# Altium PCB arm.PcbDoc
Units mil, origin at the board's own origin, x right, y up, seen from the top; angles counter-clockwise.
Board outline 6000 x 4000 mil, 2 copper layers (Top Layer, Bottom Layer); 92 components, 88 nets, 431 pads, 0 vias.
Unrouted connection lines stored in the file: 251.
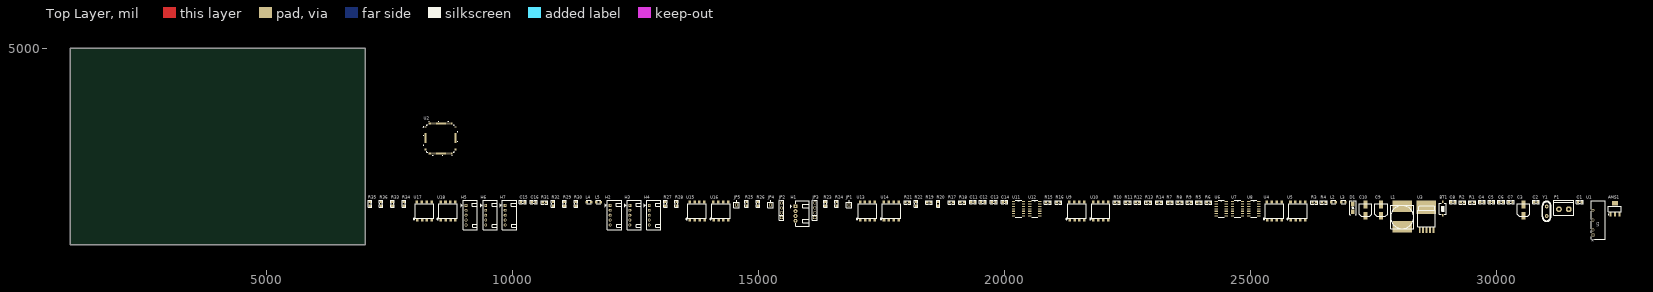
[diagram p0: Top Layer view]
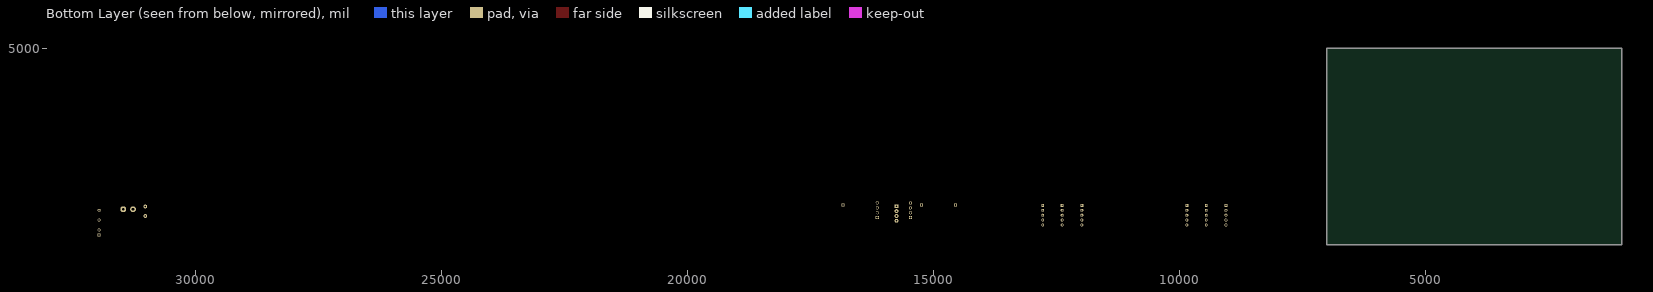
[diagram p1: Bottom Layer view, seen from below]

## Layer stack, top to bottom
Top Solder: solder mask 0.4, Solder Resist, Dk 3.5
Top Layer: signal copper 1.4
Dielectric 1: dielectric 12.6, FR-4, Dk 4.8
Bottom Layer: signal copper 1.4
Bottom Solder: solder mask 0.4, Solder Resist, Dk 3.5

## Board outline
1000,1000 7000,1000 7000,5000 1000,5000

## Design rules (kind name [scope] priority, off if disabled: settings)
Clearance [All] p1: gap=10 ignorepadtopadclearanceinfootprint=FALSE except(0: Arc-Hole Track-Hole SMDPad-Hole THPad-Hole Via-Hole Fill-Hole Poly-Hole Region-Hole Text-Hole)
PolygonConnect [All] p1: connectstyle=Relief reliefconductorwidth=10 reliefentries=4 polygonreliefangle="90 Angle" airgapwidth=10
RoomDefinition arm [InComponentClass('arm')] p1: confinementstyle=ConfineIn formatcopy=TRUE lockcomponents=FALSE outline 7045,1055 33320,1055 33320,2015 7045,2015
RoutingVias [All] p1: holewidth=28 width=50 viastyle="Through Hole" minholewidth=28 minwidth=50 maxholewidth=28 maxwidth=50
SolderMaskExpansion [All] p1: expansion=4 istentingtop=FALSE
Width [All] p1: maxlimit=10 minlimit=10 preferedwidth=10
30 further rules are at their usual default settings.

## Components (designator, comment, footprint, x,y, rotation, side; value= is the part's Value field where it differs from the comment)
AMS1 "AMS1117-3.3V" SOT223 32415,1735 r0 top value="AMS1117-3.3V SOT223"
BT1 "Nut Nhan 2 Chan SMD 3x6x2.5" "Nut Nhan 2 Chan SMD 3x6x2.5" 28915,1740 r90 top
C1 "22p" "Cap 0805" 31700,1870 r0 top
C2 "22p" "Cap 0805" 30810,1870 r0 top
C3 "100uF" "tu nhom 6.3 (d)" 30555,1710 r90 top
C4 "104" "Cap 0805" 29710,1870 r0 top
C5 "104" "Cap 0805" 29905,1870 r0 top
C6 "105" "Cap 0805" 30100,1870 r0 top
C7 "106" "Cap 0805" 30295,1870 r0 top
C8 "104" "Cap 0805" 29120,1870 r0 top
C9 "100uF" "tu nhom 6.3 (d)" 27660,1710 r90 top
C10 "100uF" "tu nhom 6.3 (d)" 27340,1710 r90 top
C11 "104" "Cap 0805" 19360,1870 r0 top
C12 "104" "Cap 0805" 19560,1870 r0 top
C13 "105" "Cap 0805" 19780,1870 r0 top
C14 "106" "Cap 0805" 20000,1870 r0 top
C15 "30p" "Cap 0805" 10205,1870 r0 top
C16 "30p" "Cap 0805" 10425,1870 r0 top
D1 "SS34" "DIODE SMA" 27085,1755 r90 top
H1 "Header 4P 2.54 Duc Cong" "Header 4P DC 2.54" 15750,1785 r0 top
H2 "Header 5P 2.54 Duc Cong" "Header 5P DC 2.54" 11980,1805 r0 top
H3 "Header 5P 2.54 Duc Cong" "Header 5P DC 2.54" 12380,1805 r0 top
H4 "Header 5P 2.54 Duc Cong" "Header 5P DC 2.54" 12775,1805 r0 top
H5 "Header 5P 2.54 Duc Cong" "Header 5P DC 2.54" 9050,1805 r0 top
H6 "Header 5P 2.54 Duc Cong" "Header 5P DC 2.54" 9450,1805 r0 top
H7 "Header 5P 2.54 Duc Cong" "Header 5P DC 2.54" 9845,1805 r0 top
JP1 "JP 1x1 2.54" "JP 1x1 DT" 16835,1815 r0 top
JP2 "JP 1x4 2.54" "JP 1x4 DT" 15465,1555 r90 top
JP3 "JP 1x4 2.54" "JP 1x4 DT" 16140,1555 r90 top
JP4 "JP 1x1 2.54" "JP 1x1 DT" 15240,1815 r0 top
JP5 "JP 1x1 2.54" "JP 1x1 DT" 14550,1815 r0 top
L1 "100uH - 3A SMD" "Cuon Cam 12x12x10" 27850,1330 r0 top
L2 "LED 0805" LED-0805-Red 26645,1870 r0 top
L3 "LED 0805" LED-0805-Red 26845,1870 r0 top
L4 "LED 0805" LED-0805-Red 11505,1870 r0 top
L5 "LED 0805" LED-0805-Red 11700,1870 r0 top
P1 "HEADER 2" "CON 2" 31275,1725 r0 top
R1 "4.7k" "tro smd 0805" 29510,1870 r0 top
R2 "4.7k" "tro smd 0805" 29315,1870 r0 top
R3 "220" "tro smd 0805" 26300,1870 r0 top
R4 "1k" "tro smd 0805" 26495,1870 r0 top
R5 "4k7" "tro smd 0805" 23955,1870 r0 top
R6 "4k7" "tro smd 0805" 24150,1870 r0 top
R7 "4k7" "tro smd 0805" 23365,1870 r0 top
R8 "4k7" "tro smd 0805" 23565,1870 r0 top
R9 "4k7" "tro smd 0805" 23760,1870 r0 top
R10 "220" "tro smd 0805" 22285,1870 r0 top
R11 "220" "tro smd 0805" 22505,1870 r0 top
R12 "4k7" "tro smd 0805" 22705,1870 r0 top
R13 "4k7" "tro smd 0805" 22925,1870 r0 top
R14 "4k7" "tro smd 0805" 23145,1870 r0 top
R15 "4k7" "tro smd 0805" 20880,1870 r0 top
R16 "4k7" "tro smd 0805" 21100,1870 r0 top
R17 "220" "tro smd 0805" 18920,1870 r0 top
R18 "220" "tro smd 0805" 19140,1870 r0 top
R19 "4k7" "tro smd 0805" 18465,1870 r0 top
R20 "4k7" "tro smd 0805" 18650,1835 r90 top
R21 "4k7" "tro smd 0805" 18025,1870 r0 top
R22 "4k7" "tro smd 0805" 18200,1835 r90 top
R23 "4k7" "tro smd 0805" 16355,1835 r90 top
R24 "4k7" "tro smd 0805" 16585,1835 r90 top
R25 "220" "tro smd 0805" 14755,1835 r90 top
R26 "220" "tro smd 0805" 14985,1835 r90 top
R27 "4k7" "tro smd 0805" 13100,1835 r90 top
R28 "4k7" "tro smd 0805" 13330,1835 r90 top
R29 "220" "tro smd 0805" 11050,1835 r90 top
R30 "220" "tro smd 0805" 11280,1835 r90 top
R31 "220" "tro smd 0805" 10645,1870 r0 top
R32 "220" "tro smd 0805" 10820,1835 r90 top
R33 "4k7" "tro smd 0805" 7550,1835 r90 top
R34 "4k7" "tro smd 0805" 7780,1835 r90 top
R35 "220" "tro smd 0805" 7090,1835 r90 top
R36 "220" "tro smd 0805" 7320,1835 r90 top
U1 "B1205S-2WR3" SIP_B1205S_HLK 31965,1205 r90 top
U2 "STM32F446VET6" LQFP100-14X14MM 8530,3165 r0 top
U3 "LM2576HVS 5.0V SMD" TO263-5 28585,1535 r0 top
U4 "6N137S" 8-SMD 25495,1695 r0 top
U5 "6N137S" 8-SMD 25975,1695 r0 top
U6 "74HC14D,653" SOIC127P600X175-14N 24410,1735 r0 top
U7 "74HC14D,653" SOIC127P600X175-14N 24740,1735 r0 top
U8 "74HC14D,653" SOIC127P600X175-14N 25070,1735 r0 top
U9 "6N137S" 8-SMD 21480,1695 r0 top
U10 "6N137S" 8-SMD 21965,1695 r0 top
U11 "74HC14D,653" SOIC127P600X175-14N 20285,1735 r0 top
U12 "74HC14D,653" SOIC127P600X175-14N 20615,1735 r0 top
U13 "6N137S" 8-SMD 17220,1695 r0 top
U14 "6N137S" 8-SMD 17705,1695 r0 top
U15 "6N137S" 8-SMD 13755,1695 r0 top
U16 "6N137S" 8-SMD 14240,1695 r0 top
U17 "6N137S" 8-SMD 8210,1695 r0 top
U18 "6N137S" 8-SMD 8690,1695 r0 top
Y1 "25Mhz" "Thach Anh 2 chan cam" 31025,1685 r90 top value=4Mhz

## Footprints (in the part's own frame and the unit in brackets; to place one, negate y for a bottom-side part, rotate by r counter-clockwise, add the part's x,y. Pads: shape width x height; smd on the part's side, far side on the other; paste and mask are expansions set on the pad)
8-SMD [mm]
  rect 1.3x1.4 smd paste+0 mask+0.102: 1(-3.96,-4.96) 2(-1.42,-4.96) 3(1.12,-4.96) 4(3.66,-4.96) 5(3.59,4.58) 6(1.05,4.58) 7(-1.49,4.58) 8(-4.03,4.58)
  silkscreen extent -5.92,-4.6 4.57,3.56, body extent -5.08,-4.84 5.08,4.84, height 4.6
"Cap 0805" [mm] "Compoment SMD 80x50mil"
  rect 1.2x1.4 smd: 1(-0.946,-0.003) 2(0.954,-0.003)
  silkscreen extent -1.75,-0.89 1.75,0.89, body extent -0.97,-0.61 1.03,0.64, height 1.23
"CON 2" [mil]
  round 120 hole 59.06: 1(0,0) 2(200,0)
  silkscreen extent -100,-120 300,180, body extent -98,-135 296,160, height 394
"Cuon Cam 12x12x10" [mm] "Cuon Cam 12x12x10"
  rect 10x6 smd: 1(6.1,11.6) 2(6,1)
  silkscreen extent 0,0 12.1,12.1, body extent 0.1,-0.2 12.1,12.14, height 7.51
"DIODE SMA" [mm] "SMA"
  rect 2.5x1.7 smd: 1(-2,0) 2(2,0)
  silkscreen extent -3.68,-1.65 3.75,1.65, body extent -2.6,-1.37 2.6,1.37, height 2.4
"Header 4P DC 2.54" [mil]
  rect 78.74x78.74 hole 35: 1(-1,1)
  round 78.74 hole 35: 2(-1,-97.42) 3(-1,-195.85) 4(-1,-294.28)
  silkscreen extent -110,-409 280,115, body extent 5,-413 278,123, height 290
"Header 5P DC 2.54" [mil]
  rect 60x60 hole 35: 1(0,0)
  round 60 hole 35: 2(0,-100) 3(0,-200) 4(0,-300) 5(0,-400)
  silkscreen extent -110,-492 232,100
"JP 1x1 DT" [mm] "1pins, 1 row, straight, gold plating"
  rect 1.6x1.6 hole 1.1: 1(0,0)
  silkscreen extent -1.4,-1.4 1.4,2.17, body extent -1.27,-1.27 1.27,1.27, height 8.54
"JP 1x4 DT" [mm] "4 pins, 1 row, straight, gold plating"
  rect 1.6x1.6 hole 1.1: 1(0,0)
  round 1.6 hole 1.1: 2(2.54,0) 3(5.08,0) 4(7.62,0)
  silkscreen extent -1.27,-1.27 8.89,1.27, body extent -1.27,-1.27 8.89,1.27, height 8.54
LED-0805-Red [mil]
  rect 50x55 smd: 1(0,0) 2(90,0)
  silkscreen extent 0,-35 90,35, body extent 5,-25 85,25, height 43
LQFP100-14X14MM [mil]
  rect 47x12 smd: 1(-305.12,236.22) 2(-305.12,216.54) 3(-305.12,196.85) 4(-305.12,177.17) 5(-305.12,157.48) 6(-305.12,137.8) 7(-305.12,118.11) 8(-305.12,98.43) 9(-305.12,78.74) 10(-305.12,59.06) 11(-305.12,39.37) 12(-305.12,19.68) 13(-305.12,0) 14(-305.12,-19.68) 15(-305.12,-39.37) 16(-305.12,-59.06) 17(-305.12,-78.74) 18(-305.12,-98.43) 19(-305.12,-118.11) 20(-305.12,-137.8) 21(-305.12,-157.48) 22(-305.12,-177.17) 23(-305.12,-196.85) 24(-305.12,-216.54) 25(-305.12,-236.22) 51(305.12,-236.22) 52(305.12,-216.54) 53(305.12,-196.85) 54(305.12,-177.17) 55(305.12,-157.48) 56(305.12,-137.8) 57(305.12,-118.11) 58(305.12,-98.43) 59(305.12,-78.74) 60(305.12,-59.06) 61(305.12,-39.37) 62(305.12,-19.68) 63(305.12,0) 64(305.12,19.68) 65(305.12,39.37) 66(305.12,59.06) 67(305.12,78.74) 68(305.12,98.43) 69(305.12,118.11) 70(305.12,137.8) 71(305.12,157.48) 72(305.12,177.17) 73(305.12,196.85) 74(305.12,216.54) 75(305.12,236.22)
  rect 12x47 smd: 26(-236.22,-305.12) 27(-216.54,-305.12) 28(-196.85,-305.12) 29(-177.17,-305.12) 30(-157.48,-305.12) 31(-137.8,-305.12) 32(-118.11,-305.12) 33(-98.43,-305.12) 34(-78.74,-305.12) 35(-59.06,-305.12) 36(-39.37,-305.12) 37(-19.68,-305.12) 38(0,-305.12) 39(19.68,-305.12) 40(39.37,-305.12) 41(59.06,-305.12) 42(78.74,-305.12) 43(98.43,-305.12) 44(118.11,-305.12) 45(137.8,-305.12) 46(157.48,-305.12) 47(177.17,-305.12) 48(196.85,-305.12) 49(216.54,-305.12) 50(236.22,-305.12) 76(236.22,305.12) 77(216.54,305.12) 78(196.85,305.12) 79(177.17,305.12) 80(157.48,305.12) 81(137.8,305.12) 82(118.11,305.12) 83(98.43,305.12) 84(78.74,305.12) 85(59.06,305.12) 86(39.37,305.12) 87(19.68,305.12) 88(0,305.12) 89(-19.68,305.12) 90(-39.37,305.12) 91(-59.06,305.12) 92(-78.74,305.12) 93(-98.43,305.12) 94(-118.11,305.12) 95(-137.8,305.12) 96(-157.48,305.12) 97(-177.17,305.12) 98(-196.85,305.12) 99(-216.54,305.12) 100(-236.22,305.12)
  silkscreen extent -351,-349 349,349, body extent -315,-315 315,315, height 63
"Nut Nhan 2 Chan SMD 3x6x2.5" [mm] "Switch SMD type"
  rect 1.2x0.8 smd: 1(-3.5,0) 2(3.5,0)
  silkscreen extent -2.82,-1.85 2.82,1.85, body extent -3.05,-1.85 3.05,1.85, height 2.5
SIP_B1205S_HLK [mil]
  rect 59x59 hole 39 paste-29.5 mask+0: 1(0,0)
  round 59 hole 39 paste-29.5 mask+0: 2(100,0) 4(300,0) 6(500,0)
  silkscreen extent -92,-251 692,37, body extent -87,-139 687,139, height 400
SOIC127P600X175-14N [mil]
  rect 67x21 smd: 1(-102,150) 2(-102,100) 3(-102,50) 4(-102,0) 5(-102,-50) 6(-102,-100) 7(-102,-150) 8(102,-150) 9(102,-100) 10(102,-50) 11(102,0) 12(102,50) 13(102,100) 14(102,150)
  silkscreen extent -63,-172 63,172, body extent -118,-170 118,170, height 69
SOT223 [mm]
  rect 1x2.4 smd: 1(-2.3,-2.9) 2(0,-2.9) 3(2.3,-2.9)
  rect 3.3x2.4 smd: 4(0,2.9)
  silkscreen extent -3.47,-3.02 3.35,1.4, body extent -3.25,-3.56 3.25,3.4, height 1.68
"Thach Anh 2 chan cam" [mm]
  round 1.905 hole 0.8: 1(-2.45,0) 2(2.45,0)
  silkscreen extent -5.28,-2.29 5.21,2.29, body extent -5.68,-2.36 5.68,2.29, height 3.5
TO263-5 [mil] "TO263-5"
  rect 39.37x120 smd: 1(-140,-230) 2(-70,-230) 3(0,-230) 4(70,-230) 5(140,-230)
  rect 393.7x275.59 smd: 6(-5,230)
  silkscreen extent -180,-170 180,260, body extent -200,-242 200,310, height 180
"tro smd 0805" [mm]
  rect 1.2x1.4 smd: 1(-0.946,-0.061) 2(0.954,-0.061)
  silkscreen extent -1.75,-0.97 1.75,0.84, body extent -1.56,-0.76 1.44,0.64, height 0.53
"tu nhom 6.3 (d)" [mm]
  rect 4x2 smd: 1(-2.9,0) 2(2.9,0)
  silkscreen extent -3.3,-3.3 3.3,3.3, body extent -3.8,-3.3 3.8,3.3, height 8

## Part data
AMS1: library part "AMS1117 SMD", "Dán", Chung_Loai=Dán, Don_Vi=Con, Ma_Hang=MH000596
C1 C2 C4 C5 C6 C7 C8 C11 C12 C13 C14 C15 C16: library part "Cap 0805", "Capacitor SMD 0805"
C3 C10: library part "Tu Nhom 100uF 16V", "Dán", Chung_Loai=Dán, Don_Vi=Con, Ma_Hang=MH002219, So_Chan=2, Ten_Linh_Kien="Tụ Nhôm 100uF 16V 6.3x5.4MM"
C9: library part "Tu Nhom 100uF 25V", "Dán", Chung_Loai=Dán, Don_Vi=Con, Ma_Hang=MH002222, So_Chan=2, Ten_Linh_Kien="Tụ Nhôm 100uF 25V 6x7MM"
D1: library part "Diode SS34 ( 1N5822 )", "Dán", Chung_Loai=Dán, Don_Vi=Con, Ma_Hang=MH002104, Ten_Linh_Kien="Diode SS34 3A 40V SMA ( 1N5822 SS34A)"
H1 H2 H3 H4 H5 H6 H7: "Cắm", Chung_Loai=Cắm, Don_Vi=Con
  H1: Ma_Hang=MH001310, Ten_Linh_Kien="Header 4P XH2.54-4P Đực Cong"
  H2 H3 H4 H5 H6 H7: Ma_Hang=MH001308, Ten_Linh_Kien="Header 5P XH2.54-5P Đực Cong"
JP1 JP4 JP5: library part "JP 1x1 2.54 Duc Cong", "Cắm", Chung_Loai=Cắm, Don_Vi=Con, Ma_Hang=MH000904, Ten_Linh_Kien="Jump Đơn Đực 2.54MM 1x40P Cong Đứng"
JP2 JP3: library part "JP 1x4 2.54 Duc Thang", "Cắm", Chung_Loai=Cắm, Don_Vi=Con, Ma_Hang=MH000903, Ten_Linh_Kien="Jump Đơn Đực 2.54MM 1x40P Thẳng 11MM"
L1: library part "CUON CAM 100uH SMD", "Dán", Chung_Loai=Dán, Don_Vi=Con, Ten_Linh_Kien="Cuộn Cảm 100uH 7x7x4MM CD74"
L2 L3 L4 L5: library part "LED 0805 Do", "Dán", Chung_Loai=Dán, Don_Vi=Con, Ma_Hang=MH000897, Ten_Linh_Kien="LED 0805 Màu Đỏ (Red)"
R1 R2 R3 R4 R5 R6 R7 R8 R9 R10 R11 R12 R13 R14 R15 R16 R17 R18 R19 R20 R21 R22 R23 R24 R25 R26 R27 R28 R29 R30 R31 R32 R33 R34 R35 R36: library part "Tro 0805 1% 0.22R", "Dán", Chung_Loai=Dán, Don_Vi=Con, Ma_Hang=MH005466, So_Chan=2, Ten_Linh_Kien="Trở 0805 1% 0.22R"
U1: "Description", Manufacturer_Name=Hi-Link, Copyright="Copyright (C) 2026 Ultra Librarian. All rights reserved.", Manufacturer_Part_Number=B1205S-2WR3, RefDes=RefDes, Type=Type
U2: "ARMÂ® CortexÂ®-M4 STM32F4 Microcontroller IC 32-Bit Single-Core 180MHz 512KB (512K x 8) FLASH 100-LQFP (14x14)", Package="LQFP-100 STMicroelectronics", Check_prices=https://www.snapeda.com/parts/STM32F446VET6/STMicroelectronics/view-part/?ref=eda, MF=STMicroelectronics, MP=STM32F446VET6, SnapEDA_Link=https://www.snapeda.com/parts/STM32F446VET6/STMicroelectronics/view-part/?ref=snap
U3: "Dán", Chung_Loai=Dán, Don_Vi=Con, Ma_Hang=MH002362, Ten_Linh_Kien="LM2576HVS-5.0V BUCK 5V 3A TO263-5"
U4 U5 U9 U10 U13 U14 U15 U16 U17 U18: "Logic Output Optoisolator 15MBd Open Collector 5000Vrms 1 Channel 10kV/Âµs CMTI 8-SMD", Package="SMD-8 Lite-On Inc.", Check_prices=https://www.snapeda.com/parts/6N137S/Lite-On/view-part/?ref=eda, MF="Lite-On Inc.", MP=6N137S, SnapEDA_Link=https://www.snapeda.com/parts/6N137S/Lite-On/view-part/?ref=snap
U6 U7 U8 U11 U12: "Inverter IC 6 Channel Schmitt Trigger 14-SO", Package="SO14-14 Nexperia USA Inc.", Check_prices=https://www.snapeda.com/parts/74HC14D,653/Nexperia/view-part/?ref=eda, MF="Nexperia USA", MP=74HC14D,653, SnapEDA_Link=https://www.snapeda.com/parts/74HC14D,653/Nexperia/view-part/?ref=snap
Y1: library part "Thach Anh 2 chan Cam", "Crystal For all Crystal 2pin."
BT1: Ma_Hang=MH001036, Ten="Nút Nhấn 2 Chân 3x6x2.5MM SMD"

## Nets (pads, with @x,y where several pads share a name; then routed paths per layer and width w, separated by ;. In a path a pad name is that pad's centre, name@x,y a point inside that pad or via, vN(x,y) a via of type N, cw(c..) or ccw(c..) an arc to the next point about the centre after c; other vN are vias at no path point)
3V3: AMS1.2 AMS1.4 C4.1 C5.1 C6.1 C7.1 C11.1 C12.1 C13.1 C14.1 H1.4 JP2.1 JP3.1 R2.2 R3.1 R7.1 R8.1 R9.1 R12.1 R13.1 R14.1 R19.1 R20.1 R21.1 R22.1 R29.2 R30.1 U2.11 U2.19 U2.21 U2.22 U2.28 U2.50 U2.75 U2.100 U4.2 U5.2 U6.14 U7.14 U8.14 U9.2 U10.2 U11.14 U12.14 U13.2 U14.2 U15.2 U16.2 U17.2 U18.2
5V: C10.1 H2.2 H3.2 H4.2 H5.2 H6.2 L1.2 R4.1 R5.1 R6.1 R15.1 R16.1 R23.1 R24.1 R27.1 R28.1 R33.1 R34.1 U3.4 U4.7 U4.8 U5.7 U5.8 U9.7 U9.8 U10.7 U10.8 U13.7 U13.8 U14.7 U14.8 U15.7 U15.8 U16.7 U16.8 U17.7 U17.8 U18.7 U18.8
8P1: R10.1 U2.63
8P2: R11.1 U2.64
8P3: R17.1 U2.65
8P4: R18.1 U2.66
9P1: R25.1 U2.4
9P2: R26.1 U2.5
10P1: R31.1 U2.95
11P1: R32.1 U2.96
12P1: R35.1 U2.53
12P2: R36.1 U2.54
12V: C9.1 P1.2 U1.1 U3.1
A: JP1.1
B: JP4.1
CLK: H1.2 U2.76
DIO: H1.3 U2.72
E1A: U2.40 U6.4
E1B: U2.42 U6.8
E2A: U2.30 U7.4
E2B: U2.89 U7.8
E3A: U2.31 U8.4
E3B: U2.32 U8.8
E4A: U2.59 U11.4
E4B: U2.60 U11.8
E5A: U2.23 U12.4
E5B: U2.24 U12.8
G: C9.2 C10.2 D1.1 H2.5 H3.5 H4.5 H5.5 H6.5 L3.2 P1.1 U1.2 U3.3 U3.5 U3.6 U4.5 U5.5 U9.5 U10.5 U13.5 U14.5 U15.5 U16.5 U17.5 U18.5
G485: JP5.1
GND: AMS1.1 BT1.2 C1.2 C2.2 C3.2 C4.2 C5.2 C6.2 C7.2 C8.2 C11.2 C12.2 C13.2 C14.2 C15.2 C16.1 H1.1 JP2.4 JP3.4 L2.2 R1.2 U1.4 U2.10 U2.20 U2.27 U2.49 U2.74 U2.99 U6.7 U7.7 U8.7 U11.7 U12.7
IE1A: H2.3 H3.3 H4.3 H5.3 H6.3 R7.2 U6.1
IE1B: H2.4 H3.4 H4.4 H5.4 H6.4 R12.2 U6.5
IE2A: R8.2 U7.1
IE2B: R13.2 U7.5
IE3A: R9.2 U8.1
IE3B: R14.2 U8.5
IE4A: R19.2 U11.1
IE4B: R21.2 U11.5
IE5A: R20.2 U12.1
IE5B: R22.2 U12.5
LED1: L4.2 U2.7
LED2: L5.2 U2.80
NetAMS1_3: AMS1.3 C3.1 U1.6
NetC1_1: C1.1 U2.12 Y1.2
NetC2_1: C2.1 U2.13 Y1.1
NetD1_2: D1.2 L1.1 U3.2
NetL2_1: L2.1 R3.2
NetL3_1: L3.1 R4.2
NetL4_1: L4.1 R29.1
NetL5_1: L5.1 R30.2
NetR1_1: R1.1 U2.94
NetR10_2: R10.2 U4.3
NetR11_2: R11.2 U5.3
NetR17_2: R17.2 U9.3
NetR18_2: R18.2 U10.3
NetR25_2: R25.2 U13.3
NetR26_2: R26.2 U14.3
NetR31_2: R31.2 U15.3
NetR32_2: R32.2 U16.3
NetR35_2: R35.2 U17.3
NetR36_2: R36.2 U18.3
NetU6_2: U6.2 U6.3
NetU6_6: U6.6 U6.9
NetU7_2: U7.2 U7.3
NetU7_6: U7.6 U7.9
NetU8_2: U8.2 U8.3
NetU8_6: U8.6 U8.9
NetU11_2: U11.2 U11.3
NetU11_6: U11.6 U11.9
NetU12_2: U12.2 U12.3
NetU12_6: U12.6 U12.9
NRST: BT1.1 C8.1 R2.1 U2.14
O8P1: H2.1 R5.2 U4.6
O8P2: H3.1 R6.2 U5.6
O8P3: H4.1 R15.2 U9.6
O8P4: H5.1 R16.2 U10.6
O9P1: H7.1 R23.2 U13.6
O9P2: H7.2 R24.2 U14.6
O10P1: H6.1 R27.2 U15.6
O11P1: H7.3 R28.2 U16.6
O12P1: H7.4 R33.2 U17.6
O12P2: H7.5 R34.2 U18.6
RX: JP2.2 U2.69
RX2: JP3.2 U2.26
TX: JP2.3 U2.68
TX2: JP3.3 U2.25
vc1: C15.1 U2.48
vc2: C16.2 U2.73
pads on no net: U2.1 U2.2 U2.3 U2.6 U2.8 U2.9 U2.15 U2.16 U2.17 U2.18 U2.29 U2.33 U2.34 U2.35 U2.36 U2.37 U2.38 U2.39 U2.41 U2.43 U2.44 U2.45 U2.46 U2.47 U2.51 U2.52 U2.55 U2.56 U2.57 U2.58 U2.61 U2.62 U2.67 U2.70 U2.71 U2.77 U2.78 U2.79 U2.81 U2.82 U2.83 U2.84 U2.85 U2.86 U2.87 U2.88 U2.90 U2.91 U2.92 U2.93 U2.97 U2.98 U4.1 U4.4 U5.1 U5.4 U6.10 U6.11 U6.12 U6.13 U7.10 U7.11 U7.12 U7.13 U8.10 U8.11 U8.12 U8.13 U9.1 U9.4 U10.1 U10.4 U11.10 U11.11 U11.12 U11.13 U12.10 U12.11 U12.12 U12.13 U13.1 U13.4 U14.1 U14.4 U15.1 U15.4 U16.1 U16.4 U17.1 U17.4 U18.1 U18.4

## Text inside footprints (layer, text, board x,y; h text height)
U1: Top Overlay "*" at 31990,1065.5 h50 r90; Mechanical 13 "*" at 31990,1115.5 h50 r90